# EAGLE board untitled (EAGLE 5.10)
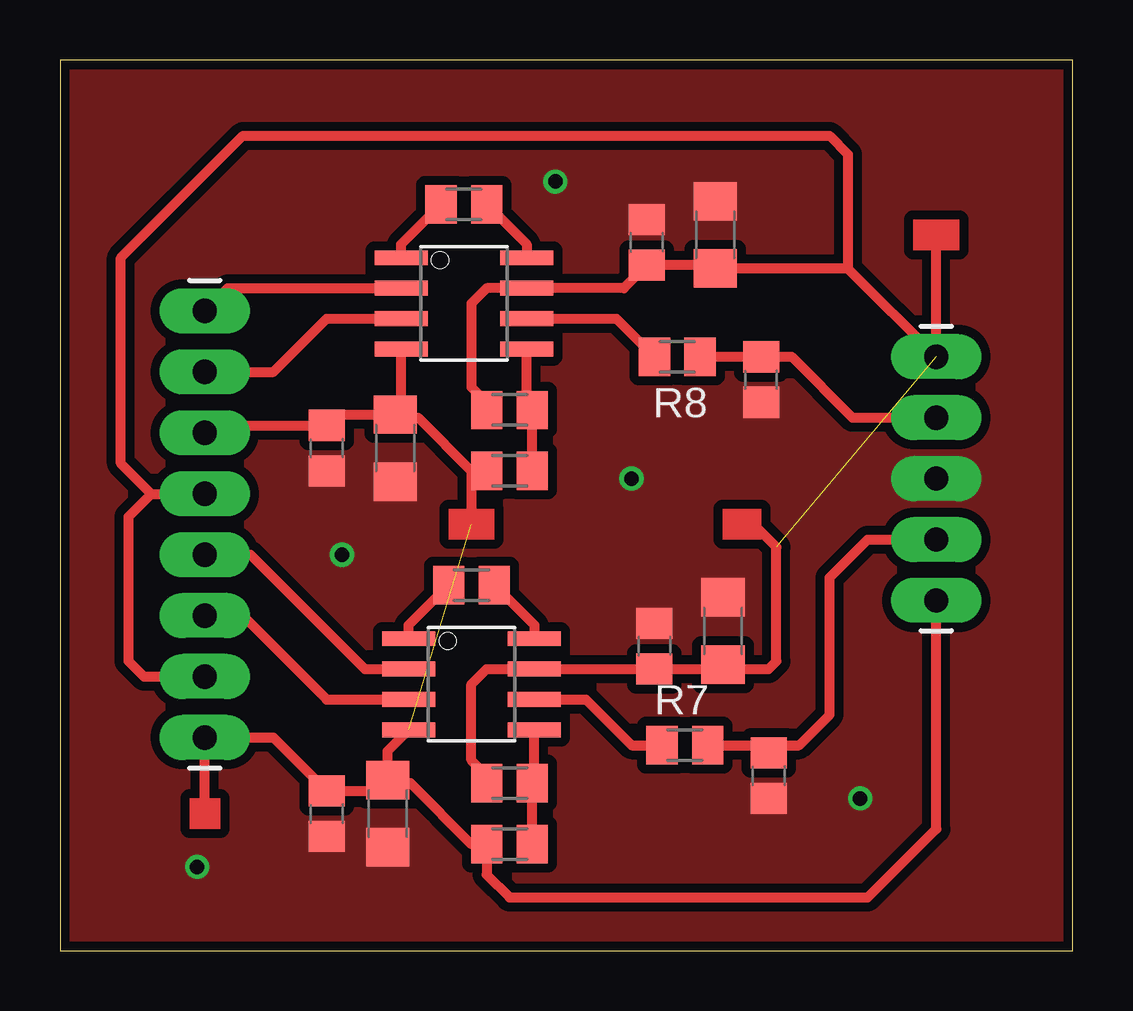
[diagram p0: board, top side]
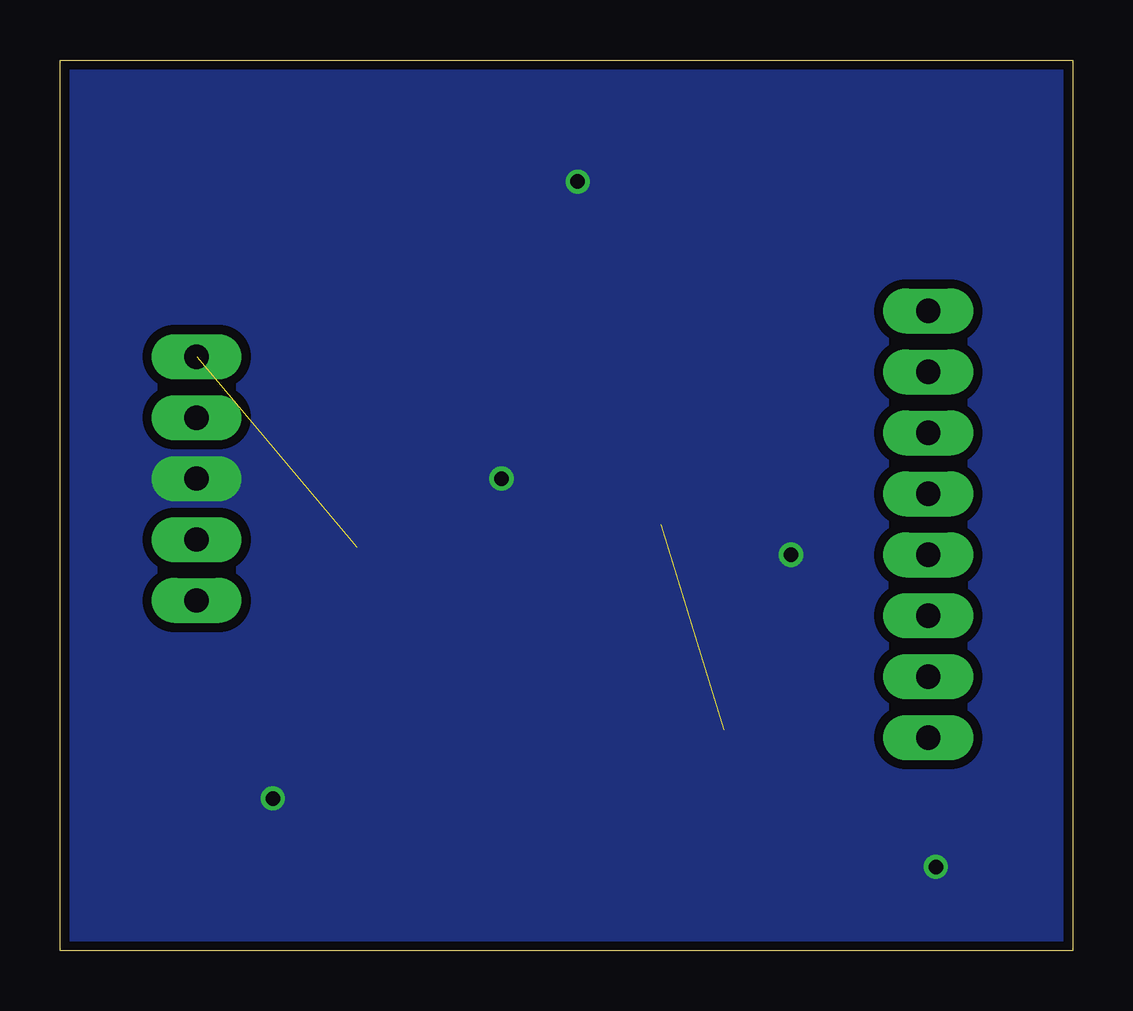
[diagram p1: board, bottom side, seen from below]

Size 42.21 x 37.14 mm. Coordinates in mm from the lower left corner, seen from the top.
Outline: 0,0 42.21,0 42.21,37.14 0,37.14 0,0
Copper layers (1*16): Top 0.035mm / dielectric 1.5mm / Bottom 0.035mm
Design rules "default *": minimum track width 8mil, minimum drill 14mil, track to track 8mil, track to pad 8mil, pad to pad 8mil, via to via 8mil, smd to smd 0mil, copper to edge 5mil, drill to drill 8mil, minimum pad ring 10mil, minimum via ring 8mil, stop-mask expansion 4mil, vias tented up to drill 0mil, thermal gap 10mil

## Footprints (pad centres in the part's own frame; a part is rotated, then mirrored left to right if it is on the bottom)
C0805 = smd 1.3 x 1.5: 1 -0.95,0; 2 0.95,0
C1206 = smd 1.6 x 1.8: 1 -1.4,0; 2 1.4,0
SO08 = smd 0.61 x 2.21: 1 -1.905,-2.616; 2 -0.635,-2.616; 3 0.635,-2.616; 4 1.905,-2.616; 5 1.905,2.616; 6 0.635,2.616; 7 -0.635,2.616; 8 -1.905,2.616
1X08_LONGPADS = drill 1.016 pad 1.88 long: 1 0,0; 2 2.54,0; 3 5.08,0; 4 7.62,0; 5 10.16,0; 6 12.7,0; 7 15.24,0; 8 17.78,0
1X05_LONGPADS = drill 1.016 pad 1.88 long: 1 0,0; 2 2.54,0; 3 5.08,0; 4 7.62,0; 5 10.16,0
M0805 = smd 1.3 x 1.6: 1 -0.95,0; 2 0.95,0

## Placement (x,y rotation side)
C1  100nF  [C0805]  24.77,12.7 90 top
C2  100nF  [C0805]  11.11,5.71 270 top
C3  100nF  [C0805]  24.45,29.53 90 top
C4  1uF  [C0805]  11.11,20.95 270 top
C5  1uF  [C1206]  13.65,5.71 270 top
C6  1uF  [C1206]  27.62,13.33 90 top
C7  1uF  [C1206]  27.31,29.84 90 top
C8  100nF  [C1206]  13.97,20.95 270 top
C9  100nF  [C0805]  29.53,7.3 270 top
C11  100nF  [C0805]  29.21,23.81 270 top
IC1  INA126U  [SO08]  16.83,26.99 270 top
IC2  INA129U  [SO08]  17.15,11.11 270 top
JP1  ANALOG IN  [1X08_LONGPADS]  6.03,8.89 90 top
JP2  OUTPUT/SUPPLY  [1X05_LONGPADS]  36.51,14.61 90 top
R1  [M0805]  16.83,31.11 180 top
R2  [M0805]  18.73,20 0 top
R3  [M0805]  18.73,22.54 180 top
R4  [M0805]  18.73,6.98 180 top
R5  [M0805]  18.73,4.45 0 top
R6  [M0805]  17.15,15.24 0 top
R7  [M0805]  26.04,8.57 0 top
R8  [M0805]  25.72,24.77 180 top

## Library data of the parts
C1-C9 C11 R1-R8 = rcl
IC1 IC2 = burr-brown
JP1 JP2 = SparkFun

## Nets
+5V: C1.1 C3.1 C6.1 C7.1 IC1.7 IC2.7 JP1.2 JP1.5 JP2.5 R3.2 R4.2
-5V: C2.1 C4.1 C5.1 C8.1 IC1.4 IC2.4 JP1.1 JP1.6 JP2.1 R2.1 R5.1
CURR_IN+: IC2.3 JP1.3
CURR_IN-: IC2.2 JP1.4
CURR_OUT: C9.1 JP2.2 R7.2
GND: C1.2 C2.2 C3.2 C4.2 C5.2 C6.2 C7.2 C8.2 C9.2 C11.2 JP2.3
LOAD_IN+: IC1.3 JP1.7
LOAD_IN-: IC1.2 JP1.8
LOAD_OUT: C11.1 JP2.4 R8.1
N$1: IC1.1 R1.2
N$2: IC1.8 R1.1
N$3: IC2.8 R6.2
N$4: IC2.1 R6.1
N$7: IC2.6 R7.1
N$8: IC1.6 R8.2
N$11: IC2.5 R4.1 R5.2
N$15: IC1.5 R2.2 R3.1

## Tracks (layer width: path | path; a pad name or v marks a point on that pad's centre or on a via)
+5V  (1 unrouted)
  Top 0.406: R3.2 17.78,22.86 17.15,23.5 17.15,26.99 17.78,27.62 IC1.7 23.49,27.62 C3.1 27.17,28.58 C7.1 32.83,28.45 | 32.83,28.45 JP2.5 36.51,29.84 | IC2.7 C1.1 27.44,11.75 C6.1 | R4.2 17.78,7.3 17.15,7.94 17.15,11.11 17.78,11.75 IC2.7 | JP1.2 3.49,11.43 2.86,12.06 2.86,18.1 3.81,19.05 | 3.81,19.05 2.54,20.32 2.54,28.89 7.62,33.97 32.07,33.97 32.83,33.21 32.83,28.45 | 3.81,19.05 JP1.5 | IC2.7 29.53,11.75 29.85,12.06 29.85,16.83 28.58,18.1
-5V  (1 unrouted)
  Top 0.406: JP1.6 6.35,21.91 C4.1 11.56,22.36 C8.1 | IC1.4 14.21,22.6 C8.1 | 17.15,20 R2.1 | 17.15,20 14.92,22.22 14.1,22.22 C8.1 | C5.1 13.2,6.66 C2.1 8.89,8.89 JP1.1 6.03,5.71 | C5.1 13.65,8.33 IC2.4 | C5.1 13.78,6.98 14.61,6.98 17.15,4.45 R5.1 17.78,3.17 18.73,2.22 33.66,2.22 36.51,5.08 JP2.1 | 17.15,20 17.15,17.78
CURR_IN+
  Top 0.406: IC2.3 11.11,10.48 7.62,13.97 JP1.3
CURR_IN-
  Top 0.406: IC2.2 12.7,11.75 7.94,16.51 JP1.4
CURR_OUT
  Top 0.406: R7.2 29.21,8.57 | 29.21,8.57 C9.1 | 29.21,8.57 30.8,8.57 32.07,9.84 32.07,15.56 33.66,17.14 JP2.2
GND  (via drill 0.6)
  other vias: 33.34,6.35 23.81,19.68 5.71,3.49 20.64,32.07 11.75,16.51
  pour Bottom (isolate 0.381, no thermals): -0.32,38.1 -0.32,-0.64 57.47,-0.32 57.47,38.42
  pour Top (isolate 0.381, no thermals): -0.32,38.42 -0.32,-0.32 57.47,-0.32 57.47,38.42
LOAD_IN+
  Top 0.406: IC1.3 11.11,26.35 8.89,24.13 JP1.7
LOAD_IN-
  Top 0.406: IC1.2 6.98,27.62 JP1.8
LOAD_OUT
  Top 0.406: R8.1 C11.1 30.48,24.77 33.02,22.22 JP2.4
N$1
  Top 0.406: IC1.1 14.21,29.45 R1.2
N$2
  Top 0.406: IC1.8 19.44,29.45 R1.1
N$3
  Top 0.406: IC2.8 19.76,13.57 R6.2
N$4
  Top 0.406: IC2.1 14.53,13.57 R6.1
N$7
  Top 0.406: IC2.6 21.91,10.48 23.81,8.57 R7.1
N$8
  Top 0.406: IC1.6 23.18,26.35 R8.2
N$11
  Top 0.406: R5.2 R4.1 19.76,7.06 IC2.5
N$15
  Top 0.406: R2.2 R3.1 19.44,22.78 IC1.5
(copper drawn outside any net)
  shapes: Top area x16